# EAGLE board interface (EAGLE 5.01)
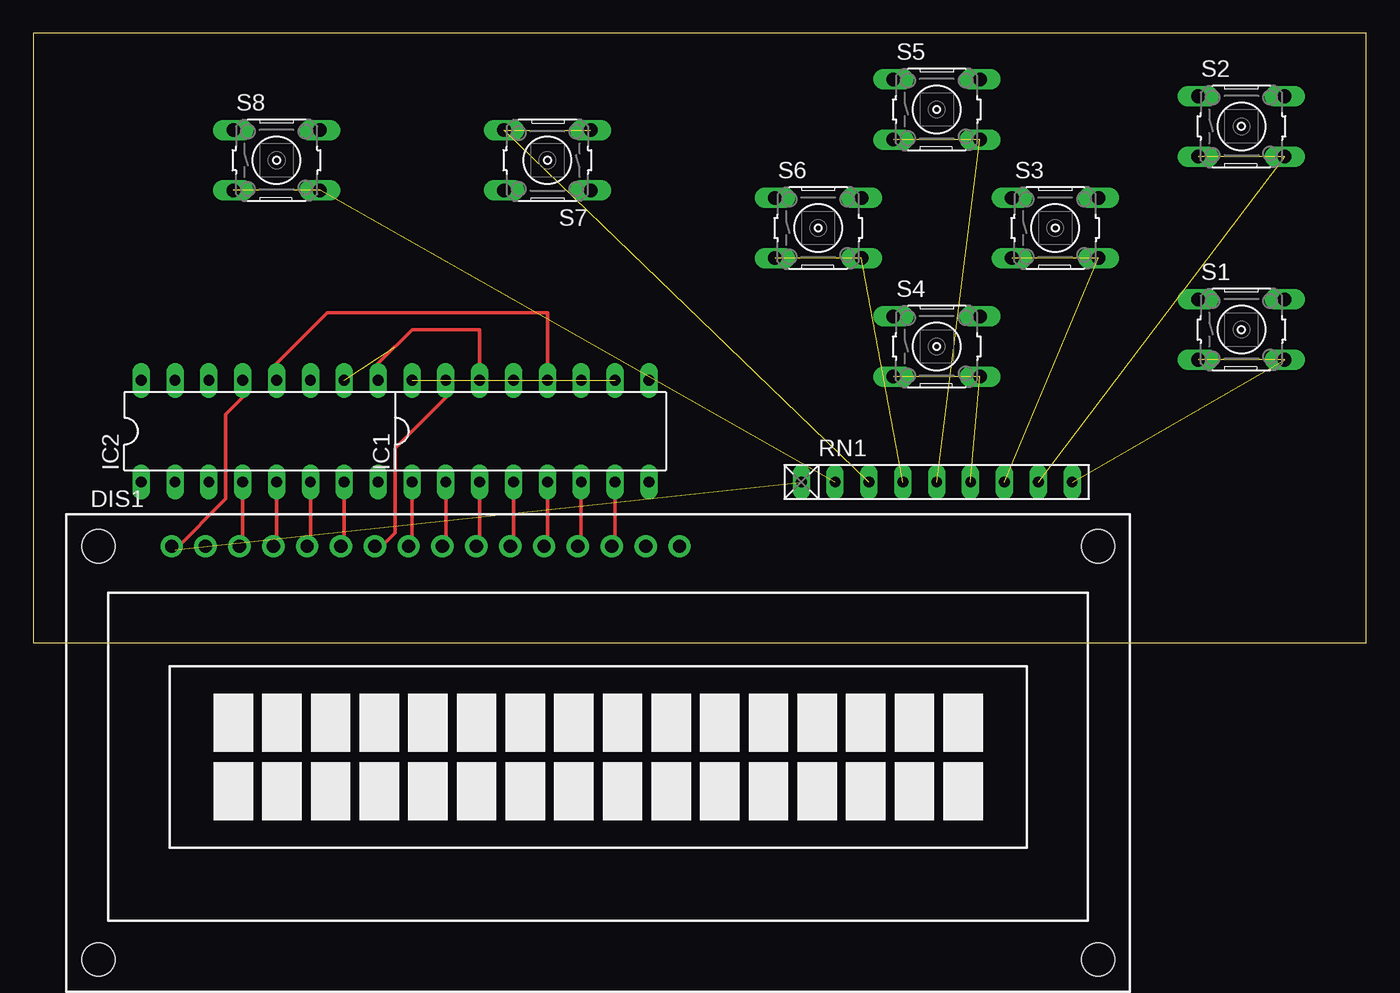
[diagram p0: board, top side]
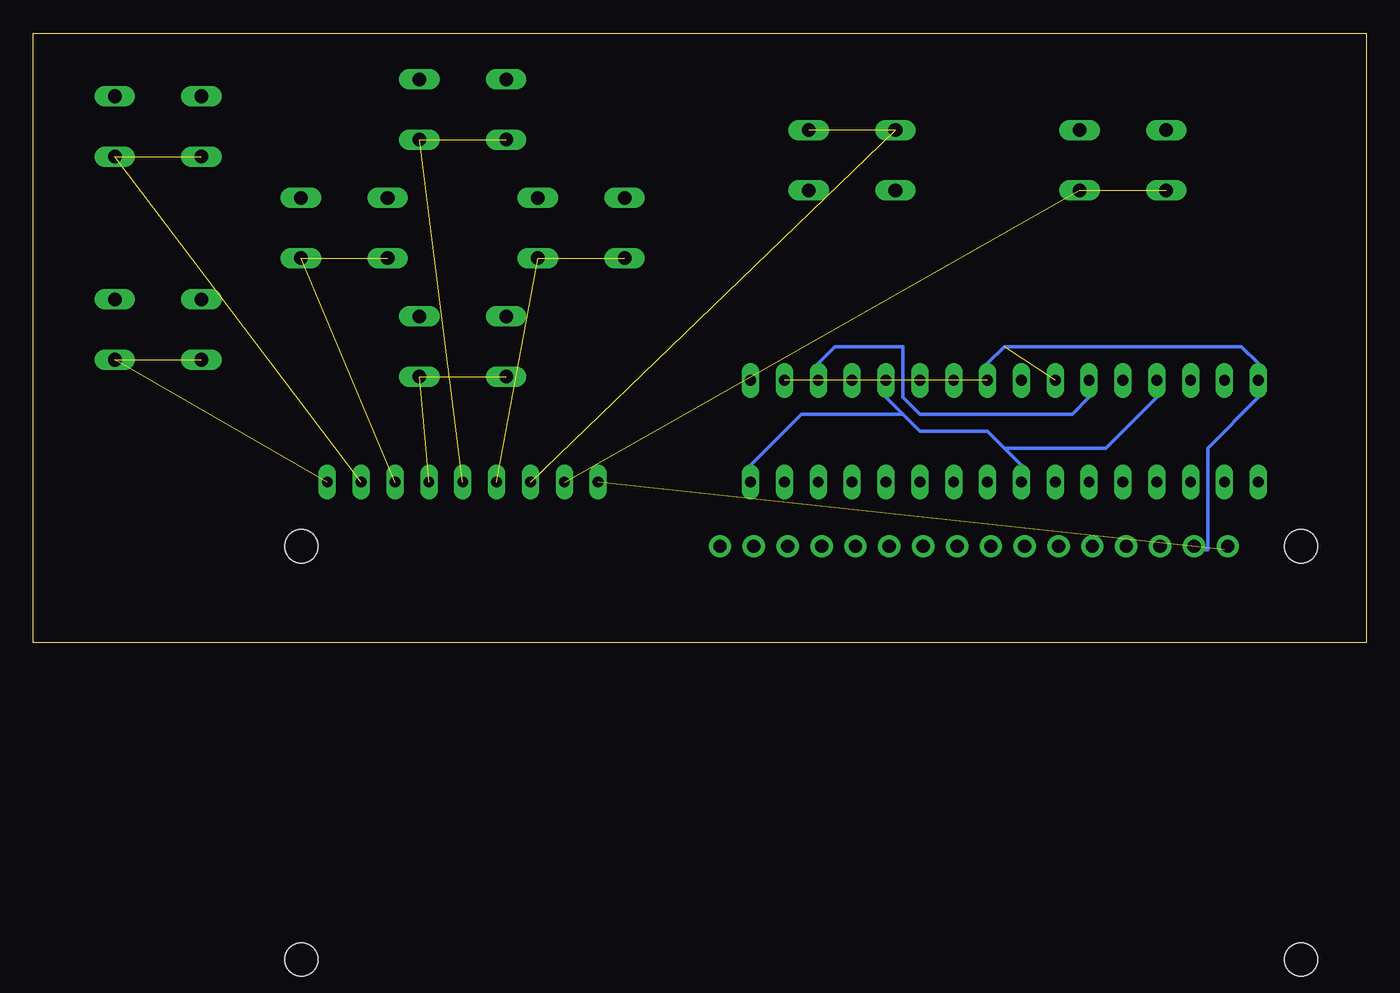
[diagram p1: board, bottom side, seen from below]

Size 100 x 45.71 mm. Coordinates in mm from the lower left corner, seen from the top.
Outline: 0,0 100,0 100,45.71 0,45.71 0,0
Copper layers (1*16): Top 0.035mm / dielectric 1.5mm / Bottom 0.035mm
Design rules "default": minimum track width 10mil, minimum drill 24mil, track to track 8mil, track to pad 8mil, pad to pad 8mil, via to via 8mil, smd to smd 8mil, copper to edge 40mil, drill to drill 8mil, minimum pad ring 10mil, minimum via ring 8mil, stop-mask expansion 4mil, vias tented up to drill 0mil, thermal gap 10mil

## Footprints (pad centres in the part's own frame; a part is rotated, then mirrored left to right if it is on the bottom)
TUXGR_16X2_R2 = drill 1 pad 1.676 round: 1 -32,15.5; 2 -29.46,15.5; 3 -26.92,15.5; 4 -24.38,15.5; 5 -21.84,15.5; 6 -19.3,15.5; 7 -16.76,15.5; 8 -14.22,15.5; 9 -11.68,15.5; 10 -9.14,15.5; 11 -6.6,15.5; 12 -4.06,15.5; 13 -1.52,15.5; 14 1.02,15.5; 15 3.56,15.5; 16 6.1,15.5 | hole 2.5: -37.5,-15.5; 37.5,-15.5; -37.5,15.5; 37.5,15.5
DIL16 = drill 0.813 long: 1 -8.89,-3.81; 2 -6.35,-3.81; 3 -3.81,-3.81; 4 -1.27,-3.81; 5 1.27,-3.81; 6 3.81,-3.81; 7 6.35,-3.81; 8 8.89,-3.81; 9 8.89,3.81; 10 6.35,3.81; 11 3.81,3.81; 12 1.27,3.81; 13 -1.27,3.81; 14 -3.81,3.81; 15 -6.35,3.81; 16 -8.89,3.81
RN-9 = drill 0.813 long: 1 -10.16,0; 2 -7.62,0; 3 -5.08,0; 4 -2.54,0; 5 0,0; 6 2.54,0; 7 5.08,0; 8 7.62,0; 9 10.16,0
B3F-10XX = drill 1.016 long: 1 -3.251,2.261; 2 3.251,2.261; 3 -3.251,-2.261; 4 3.251,-2.261

## Placement (x,y rotation side)
DIS1  TUXGR_16X2_R2  [TUXGR_16X2_R2]  42.38,-8.26 0 top
IC1  74LS595N  [DIL16]  37.3,15.87 0 top
IC2  74LS595N  [DIL16]  16.98,15.87 0 top
RN1  100K  [RN-9]  67.78,12.06 0 top
S1  [B3F-10XX]  90.64,23.49 0 top
S2  [B3F-10XX]  90.64,38.73 0 top
S3  [B3F-10XX]  76.67,31.11 0 top
S4  [B3F-10XX]  67.78,22.22 0 top
S5  [B3F-10XX]  67.78,40 0 top
S6  [B3F-10XX]  58.89,31.11 0 top
S7  [B3F-10XX]  38.57,36.19 180 top
S8  [B3F-10XX]  18.25,36.19 0 top

## Library data of the parts
DIS1 = display-lcd
IC1 IC2 = 74xx-us
RN1 = resistor-net
S1-S8 = switch-omron

## Nets
CLOCK: IC1.11 IC2.11
GND: DIS1.1 IC1.8 IC1.13 IC2.8 IC2.13 RN1.1
LATCH: IC1.12 IC2.12
N$1: DIS1.7 IC1.15
N$2: DIS1.8 IC1.1
N$3: DIS1.9 IC1.2
N$4: DIS1.10 IC1.3
N$5: DIS1.11 IC1.4
N$6: DIS1.12 IC1.5
N$7: DIS1.13 IC1.6
N$8: DIS1.14 IC1.7
N$9: DIS1.6 IC2.7
N$10: DIS1.5 IC2.6
N$11: DIS1.4 IC2.5
N$12: DIS1.3 IC2.4
N$13: IC1.14 IC2.9
N$14: RN1.9 S1.3 S1.4
N$15: RN1.8 S2.3 S2.4
N$16: RN1.7 S3.3 S3.4
N$17: RN1.6 S4.3 S4.4
N$18: RN1.5 S5.3 S5.4
N$19: RN1.4 S6.3 S6.4
N$20: RN1.3 S7.3 S7.4
N$21: RN1.2 S8.3 S8.4
SERIAL_IN: IC2.14
VCC: DIS1.2 IC1.10 IC1.16 IC2.10 IC2.16

## Tracks (layer width: path | path; a pad name or v marks a point on that pad's centre or on a via)
CLOCK
  Bottom 0.254: IC2.11 20.79,18.41 22.06,17.14 33.49,17.14 34.76,18.41 34.76,22.22 39.84,22.22 41.11,20.95 IC1.11
GND  (1 unrouted)
  Top 0.254: DIS1.1 10.63,6.98 14.44,10.79 14.44,17.14 15.71,18.41 IC2.13
  Bottom 0.254: 27.14,14.6 28.41,15.87 33.49,15.87 34.76,17.14 | 27.14,14.6 25.87,13.33 IC2.8 | 34.76,17.14 36.03,18.41 IC1.13 | 34.76,17.14 42.38,17.14 46.19,13.33 IC1.8 | 27.14,14.6 19.52,14.6 15.71,18.41 IC2.13
LATCH
  Top 0.254: IC2.12 18.25,20.95 22.06,24.76 38.57,24.76 IC1.12
N$1
  Top 0.254: IC1.15 30.95,18.41 27.14,14.6 27.14,8.25 25.87,6.98 DIS1.7
N$2
  Top 0.254: IC1.1 28.41,6.98 DIS1.8
N$3
  Top 0.254: IC1.2 30.95,6.98 DIS1.9
N$4
  Top 0.254: IC1.3 33.49,6.98 DIS1.10
N$5
  Top 0.254: IC1.4 36.03,6.98 DIS1.11
N$6
  Top 0.254: IC1.5 38.57,6.98 DIS1.12
N$7
  Top 0.254: IC1.6 41.11,6.98 DIS1.13
N$8
  Top 0.254: IC1.7 43.65,6.98 DIS1.14
N$9
  Top 0.254: IC2.7 23.33,6.98 DIS1.6
N$10
  Top 0.254: IC2.6 20.79,6.98 DIS1.5
N$11
  Top 0.254: IC2.5 18.25,6.98 DIS1.4
N$12
  Top 0.254: IC2.4 15.71,6.98 DIS1.3
N$13
  Top 0.254: IC2.9 25.87,20.95 28.41,23.49 33.49,23.49 IC1.14
N$14  (2 unrouted)
N$15  (2 unrouted)
N$16  (2 unrouted)
N$17  (2 unrouted)
N$18  (2 unrouted)
N$19  (2 unrouted)
N$20  (2 unrouted)
N$21  (2 unrouted)
VCC  (2 unrouted)
  Bottom 0.254: DIS1.2 13.17,6.98 11.9,6.98 11.9,14.6 8.09,18.41 IC2.16 8.09,20.95 9.36,22.22 27.14,22.22 28.41,20.95 IC1.16